# Altium PCB IOT_v2.PcbDoc
Units mil, origin at the board's own origin, x right, y up, seen from the top; angles counter-clockwise.
Board outline 2560 x 3850 mil, 2 copper layers (Top Layer, Bottom Layer); 69 components, 50 nets, 249 pads, 178 vias.
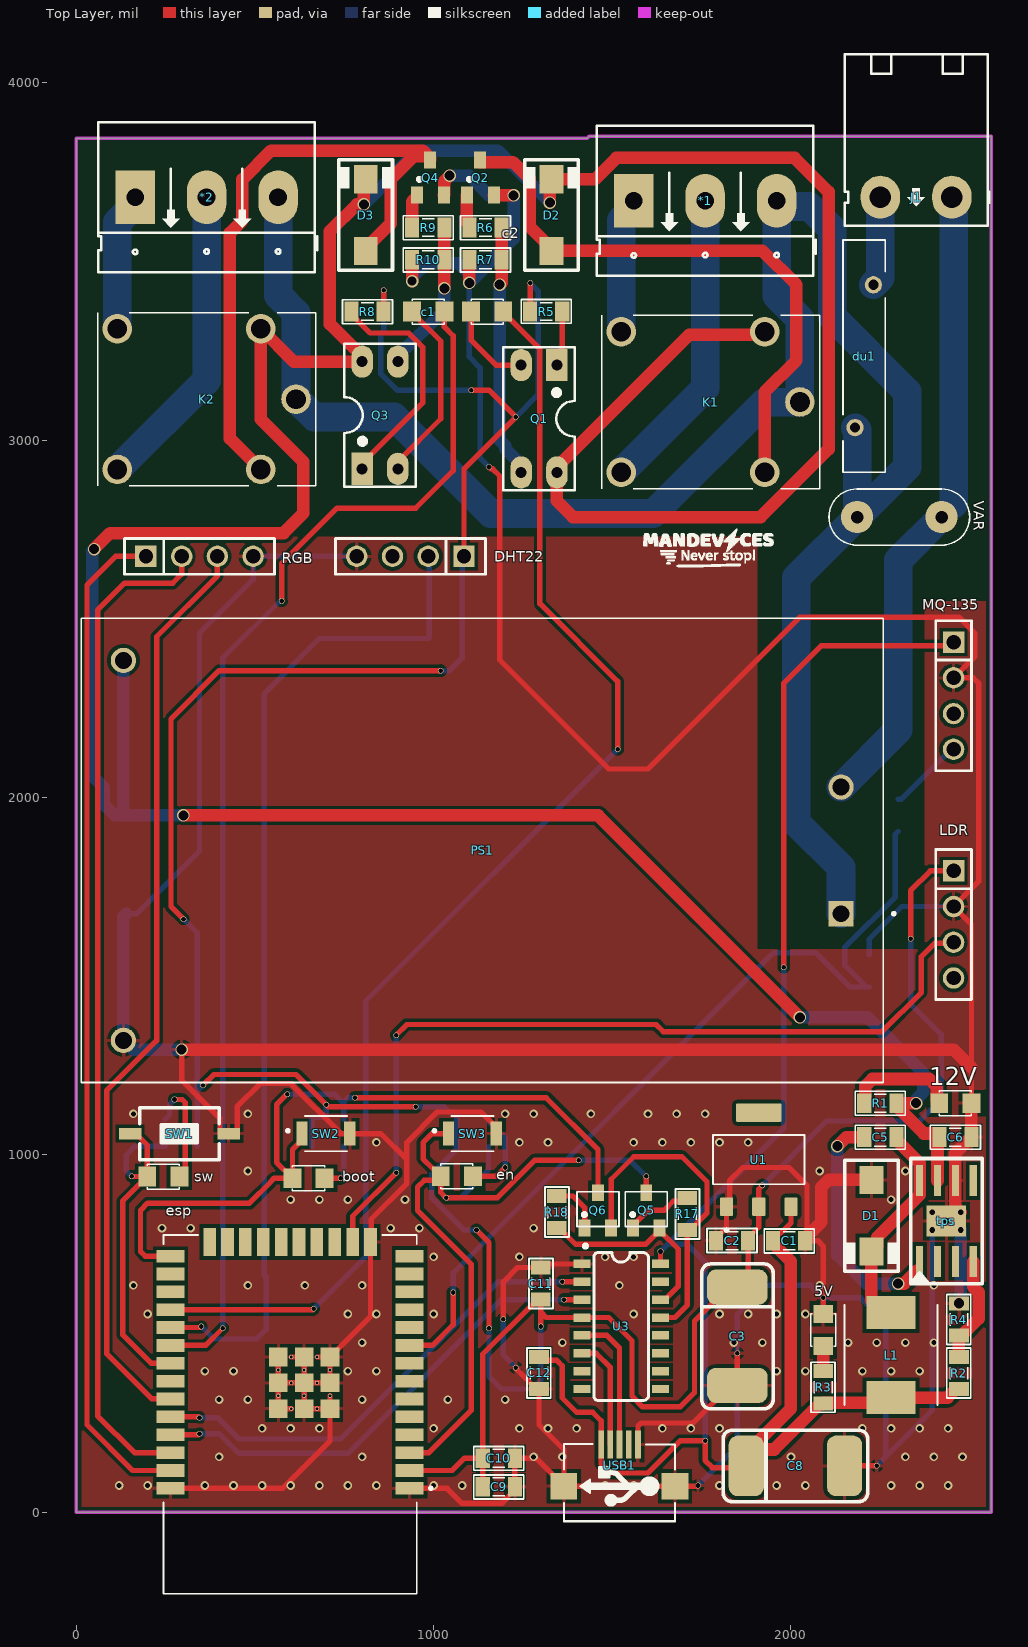
[diagram p0: Top Layer view]
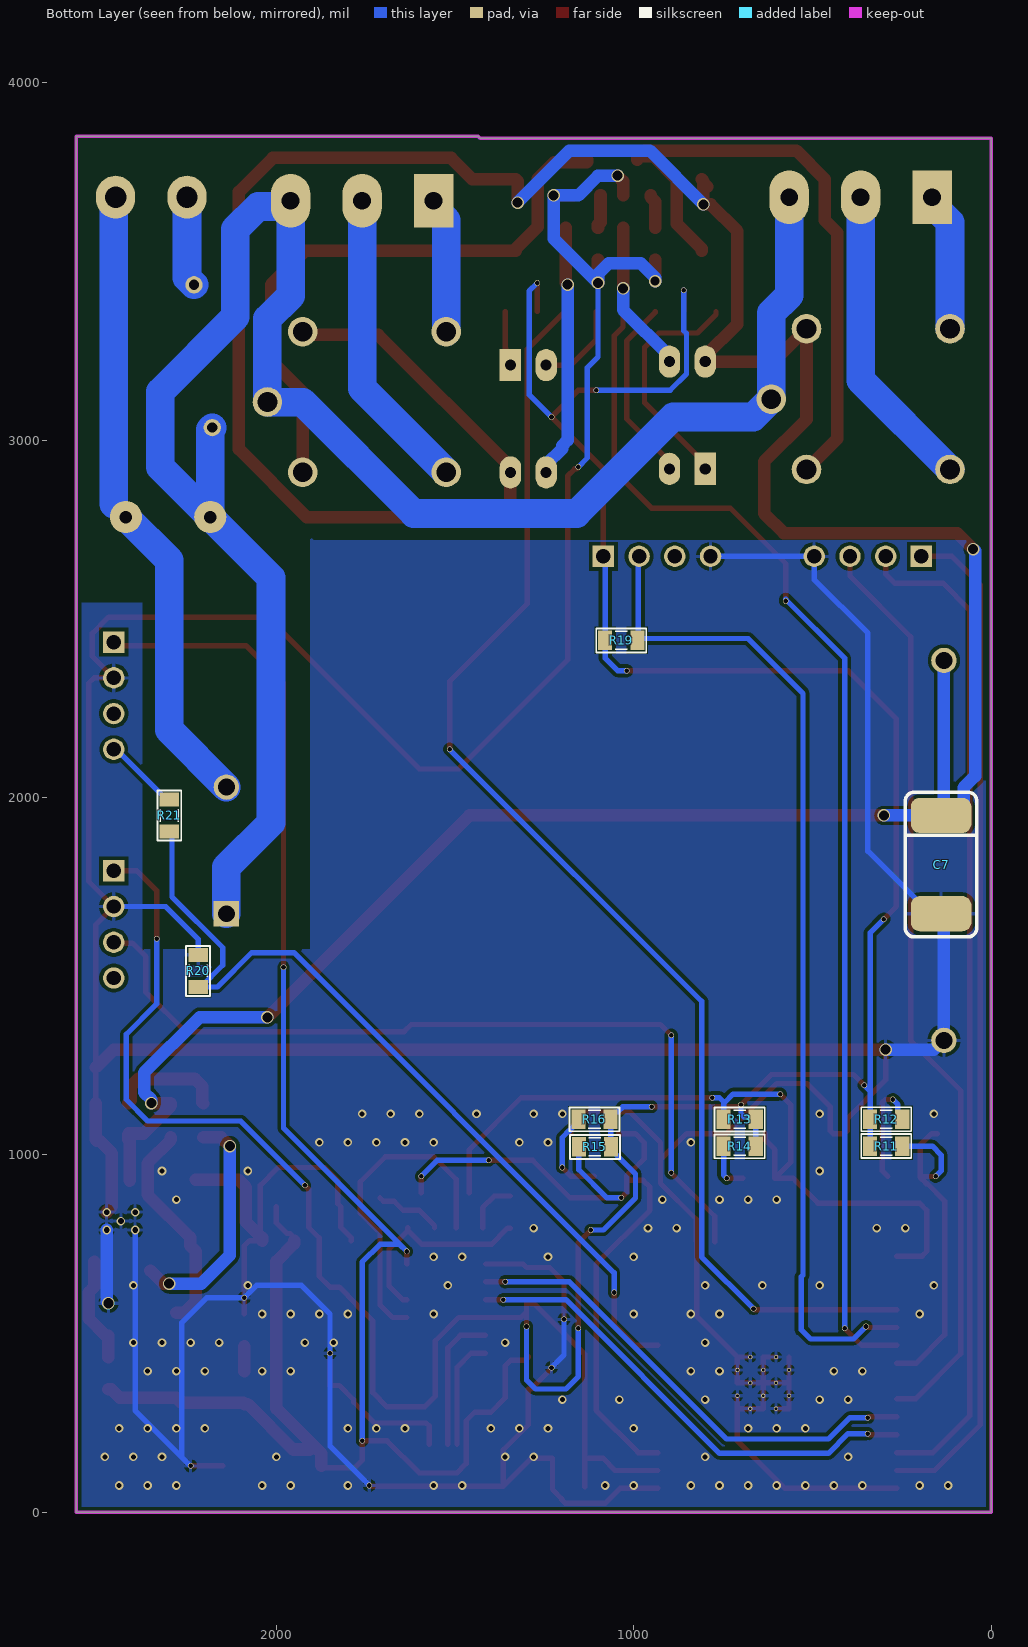
[diagram p1: Bottom Layer view, seen from below]

## Layer stack, top to bottom
Top Solder: solder mask 0.4, Solder Resist, Dk 3.5
Top Layer: signal copper 1.4
Dielectric 1: dielectric 12.6, FR-4, Dk 4.8
Bottom Layer: signal copper 1.4
Bottom Solder: solder mask 0.4, Solder Resist, Dk 3.5

## Board outline
0,0 0,3845 1430,3845 1435,3850 2560,3850 2560,0

## Design rules (kind name [scope] priority, off if disabled: settings)
Clearance [All] p1: gap=10 ignorepadtopadclearanceinfootprint=FALSE
DiffPairsRouting [All] p1: maxlimit=10 minlimit=10 mostfreqgap=10 toplayer_minwidth=15 toplayer_maxwidth=15 toplayer_prefwidth=15 bottomlayer_minwidth=15 bottomlayer_maxwidth=15 bottomlayer_prefwidth=15 maxuncoupledlength=500
PolygonConnect [All] p1: connectstyle=Relief reliefconductorwidth=10 reliefentries=4 polygonreliefangle="90 Angle" airgapwidth=10
RoutingVias [All] p1: holewidth=12.99 width=15.75 viastyle="Through Hole" minholewidth=12.99 minwidth=15.75 maxholewidth=12.99 maxwidth=15.75
SolderMaskExpansion [All] p1: expansion=4 istentingtop=FALSE
Width [All] p1: maxlimit=80 minlimit=15 preferedwidth=35
29 further rules are at their usual default settings.

## Classes and differential pairs
differential pair class diff: D0
component class Sensor: DHT22 LDR MQ-135 R19 R20 R21 RGB
component class Power: 5v 12V C1 C2 C3 C5 C6 C7 C8 D1 du1 J1 L1 L? PS1 PS? R1 R2 R3 R4 tps U1 VAR
component class MCU: C9 C10 C11 C12 esp Q5 Q6 R11 R12 R13 R14 R15 R16 R17 R18 SW1 SW2 SW3 U3 USB1
component class Driver: *1 *2 c2 D2 D3 K1 K2 Q1 Q2 Q3 Q4 R5 R6 R7 R8 R9 R10
differential pair D0: +D0_P -D0_N

## Components (designator, comment, footprint, x,y, rotation, side; value= is the part's Value field where it differs from the comment)
5V "LED" LED-0805-Blue 2090,465 r90 top value="LED 3 ly Single Colour" (schematic designator LED2)
12V "LED" LED-0805-Blue 2415,1145 r0 top value="LED 3 ly Single Colour" (schematic designator LED1)
*1 "BIG_Header 3" KF-128_3P 1560,3670 r0 top
*2 "BIG_Header 3" KF-128_3P 165,3680 r0 top
boot "LED" LED-0805-Blue 695,935 r180 top value="LED 3 ly Single Colour" (schematic designator LED6)
c1 "LED" LED-0805-Green 940,3360 r0 top value="LED 3 ly Single Colour" (schematic designator LED4)
C1 "104" CAP_0805 1995,760 r0 top value=33p
c2 "LED" LED-0805-Green 1105,3360 r0 top value="LED 3 ly Single Colour" (schematic designator LED3)
C2 "104" CAP_0805 1835,760 r180 top value=33p
C3 "100uF" CAP_7343 1850,495 r270 top
C5 "104" CAP_0805 2250,1050 r0 top value=33p
C6 "104" CAP_0805 2460,1050 r0 top value=33p
C7 "220uF-16V" CAP_7343 140,1815 r270 bottom
C8 "220uF-6.3V" CAP_7343 2010,130 r0 top
C9 "10uF" CAP_0805 1182.5,71.5 r0 top value=33p
C10 "10uF" CAP_0805 1182.5,151.5 r0 top value=33p
C11 "10nF" CAP_0805 1300,640 r90 top value=33p
C12 "100nF" CAP_0805 1295,390 r270 top value=33p
D1 "B340A" SMA 2225,830 r270 top
D2 "1N4007" SMA 1330,3630 r90 top value="Diode c?m 1N5408"
D3 "1N4007" SMA 810,3630 r90 top value="Diode c?m 1N5408"
DHT22 "JP4" JP4-C1T 1085,2675 r180 top (schematic designator DHT1)
du1 "Fused" FUSRR1015W52L1650T300H2620 2205,3235 r270 top
en "LED" LED-0805-Blue 1110,940 r180 top value="LED 3 ly Single Colour" (schematic designator LED7)
esp "ESP32-WROOM-32" MODULE_ESP32-WROOM-32 598.39,274.06 r180 top (schematic designator IC1)
J1 "AC_In" KF2-5.08T 2450,3680 r180 top
K1 "SRA-12VDC-CL" SRA12VDCCL 1775,3106.85 r180 top
K2 "SRA-12VDC-CL" SRA12VDCCL 365,3115 r180 top
L1 "15uH" IND_ASPI-0630LR-150M-T15 2280,440 r270 top
LDR "LDR" JP4-C1T 2455,1795 r270 top (schematic designator LDR1)
MQ-135 "JP4" JP4-C1T 2455,2435 r270 top (schematic designator MQ-1)
PS1 "HLK-20M12" CONV_HLK-20M12 1136.06,1852.17 r180 top
Q1 "PC817-B" DIP4/W0.3 1345,3210 r180 top
Q2 "2n2222" SOT23 1130,3735 r0 top value=C1815
Q3 "PC817-B" DIP4/W0.3 800,2920 r0 top
Q4 "2n222" SOT23 990,3735 r0 top value=C1815
Q5 "C1815" SOT23D 1595,845 r0 top
Q6 "C1815" SOT23D 1460,845 r0 top
R1 "2.2K" RES-SMD-0805 2250,1145 r0 top
R2 "10k" RES-SMD-0805 2470,389.5 r270 top
R3 "330" RES-SMD-0805 2090,350 r270 top
R4 "3.24K" RES-SMD-0805 2470,539.5 r270 top
R5 "130" RES-SMD-0805 1315,3360 r180 top
R6 "1K" RES-SMD-0805 1145,3595 r0 top
R7 "10K" RES-SMD-0805 1145,3505 r0 top
R8 "130" RES-SMD-0805 815,3360 r0 top
R9 "1K" RES-SMD-0805 985,3595 r0 top
R10 "10K" RES-SMD-0805 985,3505 r0 top
R11 "10k" RES-SMD-0805 293.62,1024.5 r0 bottom
R12 "330" RES-SMD-0805 293.62,1099.5 r0 bottom
R13 "10k" RES-SMD-0805 703.62,1099.5 r180 bottom
R14 "330" RES-SMD-0805 703.62,1024.5 r180 bottom
R15 "10k" RES-SMD-0805 1108.62,1023 r180 bottom
R16 "330" RES-SMD-0805 1110,1100 r180 bottom
R17 "10k" RES-SMD-0805 1710,835 r90 top
R18 "10k" RES-SMD-0805 1345,840 r90 top
R19 "10k" RES-SMD-0805 1035,2440 r180 bottom
R20 "20K" RES-SMD-0805 2219,1515 r270 bottom
R21 "10k" RES-SMD-0805 2300,1950 r90 bottom
RGB "JP4" JP4-C1T 195,2675 r0 top (schematic designator Module_RGB1)
sw "LED" LED-0805-Blue 288.62,939.5 r180 top value="LED 3 ly Single Colour" (schematic designator LED5)
SW1 "SW" BUTTON_2_SMD 288.62,1059.5 r0 top value="SW chip 2 pin"
SW2 "SW" SW_B3U-1000P 698.62,1059.5 r0 top value="SW chip 2 pin"
SW3 "SW" SW_B3U-1000P 1108.62,1059.5 r0 top value="SW chip 2 pin"
tps "TPS5430" TPS5430-2 2435,815 r90 top (schematic designator U2)
U1 "AMS1117-3.3" SOT229P700X180-4N 1909.84,986.69 r90 top
U3 "CH340C" SOP-16 1525,520 r270 top
USB1 "USB" USB-M1 1520,190 r180 top
VAR "Varistor" CAP_MICA_6MM 2185,2785 r0 top value=33p (schematic designator C4)

## Footprints (in the part's own frame and the unit in brackets; to place one, negate y for a bottom-side part, rotate by r counter-clockwise, add the part's x,y. Pads: shape width x height; smd on the part's side, far side on the other; paste and mask are expansions set on the pad)
BUTTON_2_SMD [mm]
  rect 1.6x0.8 smd: 1(-3.5,0) 2(3.5,0)
  silkscreen extent -2.82,-1.85 2.82,1.85, body extent -3.05,-1.85 3.05,1.85, height 2.5
CAP_0805 [mil]
  rect 39.37x55 smd: 1(-45,0) 2(45,0)
  silkscreen extent -70,-34 70,33, body extent -40,-25 40,25, height 24
CAP_7343 [mm] "Capacitor Tantalum 7343"
  rrect50% 2.5x4.3 smd: 1(-3.429,0) 2(3.556,0)
  silkscreen extent -5.08,-2.54 5.21,2.54, body extent -3.75,-2.14 3.75,2.16, height 2.8
CAP_MICA_6MM [mil]
  round 90 hole 35: 1(0,0) 2(236.22,0)
  silkscreen extent -79,-79 315,79, body extent -38,-79 277,79, height 539
CONV_HLK-20M12 [mm]
  rect 1.8x1.8 hole 1.2: 1(-25.5,4.5)
  round 1.8 hole 1.2: 2(-25.5,-4.5) 3(25.5,13.5) 4(25.5,-13.5)
  silkscreen extent -29.35,-16.5 28.5,16.5, body extent -28.5,-16.5 28.5,16.5, height 22.5
DIP4/W0.3 [mil] "4 PIN, W 300mil, Pin to pin 100mil"
  rect 60x90 hole 31: 1(0,0)
  oval 60x90 hole 31: 2(100,0) 3(100,300) 4(0,300)
  silkscreen extent -50,-50 150,350, body extent -59,-10 159,305, height 170
FUSRR1015W52L1650T300H2620 [mm]
  round 1.228 hole 0.72: 1(-5.075,0.65) 2(5.075,-0.65)
  silkscreen extent -8.25,-1.5 8.25,1.5
IND_ASPI-0630LR-150M-T15 [mm]
  rect 2.35x3.5 smd: 1(-3.025,0) 2(3.025,0)
  silkscreen extent -3.55,-3.3 3.55,3.3, body extent -3.6,-3.32 3.6,3.32, height 1.35
JP4-C1T [mm] "4 row, straight, gold plating"
  rect 1.52x1.52 hole 1.02: 1(0,0)
  round 1.52 hole 1.02: 2(2.54,0) 3(5.08,0) 4(7.62,0)
  silkscreen extent -1.52,-1.27 9.14,1.27, body extent -1.52,-1.25 9.14,1.25, height 8.51
KF2-5.08T [mil] "Header 2, 2 pin, hight 300mil, Pin to Pin 200, Colour Green"
  oval 110x120 hole 60: 1(0,0) 2(200,0)
  silkscreen extent -105,-400 300,80, body extent -97,-399 297,73, height 334
KF-128_3P [mil]
  rect 110x149.61 hole 50: 1(0,0)
  oval 110x149.61 hole 50: 2(200,0) 3(400,0)
  silkscreen extent -103,-210 510,210, body extent -101,-207 523,208, height 563
LED-0805-Blue [mil]
  rect 50x55 smd: 1(0,0) 2(90,0)
  silkscreen extent 0,-35 90,35, body extent 5,-25 85,25, height 43
LED-0805-Green [mil]
  rect 50x55 smd: 1(0,0) 2(90,0)
  silkscreen extent 0,-35 90,35, body extent 5,-25 85,25, height 43
MODULE_ESP32-WROOM-32 [mm]
  rect 2x0.9 smd: 1(-8.5,5.26) 2(-8.5,3.99) 3(-8.5,2.72) 4(-8.5,1.45) 5(-8.5,0.18) 6(-8.5,-1.09) 7(-8.5,-2.36) 8(-8.5,-3.63) 9(-8.5,-4.9) 10(-8.5,-6.17) 11(-8.5,-7.44) 12(-8.5,-8.71) 13(-8.5,-9.98) 14(-8.5,-11.25) 25(8.5,-11.25) 26(8.5,-9.98) 27(8.5,-8.71) 28(8.5,-7.44) 29(8.5,-6.17) 30(8.5,-4.9) 31(8.5,-3.63) 32(8.5,-2.36) 33(8.5,-1.09) 34(8.5,0.18) 35(8.5,1.45) 36(8.5,2.72) 37(8.5,3.99) 38(8.5,5.26)
  rect 0.9x2 smd: 15(-5.715,-12.25) 16(-4.445,-12.25) 17(-3.175,-12.25) 18(-1.905,-12.25) 19(-0.635,-12.25) 20(0.635,-12.25) 21(1.905,-12.25) 22(3.175,-12.25) 23(4.445,-12.25) 24(5.715,-12.25)
  rect 1.33x1.33 smd: 39_1(-2.835,-0.405) 39_2(-1,-0.405) 39_3(0.835,-0.405) 39_4(-2.835,-2.24) 39_5(-1,-2.24) 39_6(0.835,-2.24) 39_7(-2.835,-4.075) 39_8(-1,-4.075) 39_9(0.835,-4.075)
  round 0.3 hole 0.2: 39_10(-1.917,-0.405) 39_11(-0.082,-0.405) 39_12(-2.835,-1.322) 39_13(-1,-1.322) 39_14(0.835,-1.322) 39_15(-1.917,-2.24) 39_16(-0.082,-2.24) 39_17(-2.835,-3.157) 39_18(-1,-3.157) 39_19(0.835,-3.157) 39_20(-1.917,-4.075) 39_21(-0.082,-4.075)
  silkscreen extent -10.1,-12.75 9,12.75, body extent -9.02,-12.75 8.98,12.75, height 3.2
RES-SMD-0805 [mil]
  rect 39.37x55 smd: 1(-45,0) 2(45,0)
  silkscreen extent -70,-34 70,33, body extent -39,-25 39,25, height 31
SMA [mm]
  rect 2x1.7 smd: 1(-2.544,0) 2(2.544,0)
  silkscreen extent -3.94,-1.9 3.94,1.91, body extent -2.87,-1.4 2.87,1.4, height 2.29
SOP-16 [mm]
  rect 0.6x1.2 smd: 1(-4.445,-2.8) 2(-3.175,-2.8) 3(-1.905,-2.8) 4(-0.635,-2.8) 5(0.635,-2.8) 6(1.905,-2.8) 7(3.175,-2.8) 8(4.445,-2.8) 9(4.445,2.8) 10(3.175,2.8) 11(1.905,2.8) 12(0.635,2.8) 13(-0.635,2.8) 14(-1.905,2.8) 15(-3.175,2.8) 16(-4.445,2.8)
  silkscreen extent -5.84,-2.67 5.26,1.95, body extent -4.95,-3.47 4.95,3.47, height 1.75
SOT23 [mm] "SOT 23 _ 1-3-2"
  rect 0.85x1.2 smd: 1(-0.94,-1.245) 2(0.985,-1.25) 3(0.005,1.25)
  silkscreen extent -0.88,-0.25 -0.64,0, body extent -1.47,-1.33 1.53,1.17, height 1.06
SOT23D [mm] "SOT 23C - 1-3-2 - BCE"
  rect 0.85x1.2 smd: 1(-0.95,-1.25) 2(0.94,-1.245) 3(0,1.25)
  silkscreen extent -1.5,-1.14 1.5,1.32, body extent -1.5,-1.17 1.5,1.33, height 1.06
SOT229P700X180-4N [mm]
  rrect15% 1.31x0.93 smd: 1(-3.345,2.29) 2(-3.345,0) 3(-3.345,-2.29)
  rrect15% 1.31x3.24 smd: 4(3.345,0)
  silkscreen extent -5.1,-3.25 1.75,3.25, body extent -3.5,-3.25 3.5,3.25, height 1.8
SRA12VDCCL [mm]
  round 2.1 hole 1.4: 1(-3.85,-5) 2(6.35,-5) 3(6.35,5) 4(-3.85,5) 5(-6.35,0)
  silkscreen extent -7.75,-6.15 7.75,6.15, body extent -7.75,-6.15 7.75,6.15, height 14.1
SW_B3U-1000P [mm]
  rect 0.8x1.7 smd: 1(-1.7,0) 2(1.7,0)
  silkscreen extent -2.8,-1.25 1.5,1.25
TPS5430-2 [mm]
  rect 2.2x0.508 smd: 1(-2.875,1.905) 2(-2.875,0.635) 3(-2.875,-0.635) 4(-2.875,-1.905) 5(2.875,-1.905) 6(2.875,-0.635) 7(2.875,0.635) 8(2.875,1.905)
  rect 2.2x2.8 smd: 9(0,0)
  silkscreen extent -4.44,-2.54 4.44,2.54, body extent -3.33,-2.49 3.33,2.49, height 1.69
USB-M1 [mm]
  rect 0.4x2 smd: 1(1.3,0) 2(0.65,0) 3(0,0) 4(-0.65,0) 5(-1.321,0)
  rect 1.9x1.9 smd: 5(-3.95,2.968) 5(3.95,2.968)
  silkscreen extent -3.94,-0.03 3.94,5.46, body extent -3.98,0.11 4,5.54, height 2.71

## Part data
5V 12V boot c1 c2 en sw: "LED Single colour Green and Red"
C1 C2 C9 C10 C11 C12: library part CapSMD, "Capacitor", LatestRevisionDate=17-Jul-2002, LatestRevisionNote="Re-released for DXP Platform.", PackageReference=RAD-0.3, Published=8-Jun-2000, Publisher="Altium Limited"
C3: library part CAP_TAN_SMD, "https://linhkien.cxt.vn/8805-tu-tantalum-100uf-63v-7343-73x43mm.html"
C5 C6: library part CapSMD, "https://linhkien.cxt.vn/9232-tu-104-01uf-100nf-0805-25v-10-10c.html", LatestRevisionDate=17-Jul-2002, LatestRevisionNote="Re-released for DXP Platform.", PackageReference=RAD-0.3, Published=8-Jun-2000, Publisher="Altium Limited"
C7 C8: library part CAP_TAN_SMD, "https://linhkien.cxt.vn/2032-tu-tantalum-7343-cac-gia-tri.html"
D1: library part "Diode Schottky", "https://linhkien.cxt.vn/4563-b340a-13-f-diode-schottky-3a-40v-smado-214ac.html"
D2 D3: library part 1N5822, "https://linhkien.cxt.vn/1119-1n4007-m7-diode-chinh-luu-1a-1000v-smado-214ac-10c.html"
DHT22 MQ-135: "https://linhkien.cxt.vn/1788-header-duc-3p-xh254-3p-chan-thang-10c.html", Manufacturer="W¨¹rth Elektronik eiSos GmbH", partNo=613004143121, ComponentLink1 Description=Manufacturer, ComponentLink1URL=http://www.we-online.com, ComponentLink2 Description=Datasheet, ComponentLink2URL=http://katalog.we-online.de/em/datasheet/6130xx143121.pdf, Created by="Karrer Zheng", Created Date="29 March 2013", NoPins=04
du1: library part FuseNote2
esp: "Bluetooth, WiFi Transceiver Module 2.4GHz ~ 2.5GHz Surface Mount", Package="Module Espressif Systems", Digi-Key_Part_Number=1904-1010-1-ND, Digi-Key_Purchase_URL=https://www.digikey.com/product-detail/en/espressif-systems/ESP32-WROOM-32/1904-1010-1-ND/8544305?utm_source=snapeda&utm_medium=aggregator&utm_campaign=symbol, MF="Espressif Systems", MP=ESP32-WROOM-32, SnapEDA_Link=https://www.snapeda.com/parts/ESP32-WROOM-32/Espressif%20Systems/view-part/2753322/?ref=snap
J1: library part KF2, Manufacturer="Würth Elektronik eiSos GmbH", partNo=691103110002, ComponentLink1 Description=Manufacturer, ComponentLink1URL=http://www.we-online.com, ComponentLink2 Description=Datasheet, ComponentLink2URL=http://katalog.we-online.de/em/datasheet/6911031100xx.pdf, Created by="Karrer Zheng", Created Date="29 October 2013", NoPins=2
K1 K2: "https://linhkien.cxt.vn/3210-sra-12vdc-cl-songle-relay-20a-12vdc-5-chan.html", Manufacturer_Name="Songle Relay", Height=14mm, Manufacturer_Part_Number=SRA-12VDC-CL
L1: library part ASPI-0630LR-150M-T15, "https://linhkien.cxt.vn/3445-cuon-cam-150-15uh-0630-3a-7x7x3mm.html", Package="Nonstandard Abracon LLC", Check_prices=https://www.snapeda.com/parts/ASPI-0630LR-150M-T15/Abracon+LLC/view-part/?ref=eda, Digi-Key_Part_Number=ASPI-0630LR-150M-T15TR-ND, MF="Abracon LLC", MP=ASPI-0630LR-150M-T15, Purchase-URL=https://pricing.snapeda.com/search/part/ASPI-0630LR-150M-T15/?ref=eda, SnapEDA_Link=https://www.snapeda.com/parts/ASPI-0630LR-150M-T15/Abracon+LLC/view-part/?ref=snap
LDR: library part JP4, "https://linhkien.cxt.vn/1788-header-duc-3p-xh254-3p-chan-thang-10c.html", Manufacturer="W¨¹rth Elektronik eiSos GmbH", partNo=613004143121, ComponentLink1 Description=Manufacturer, ComponentLink1URL=http://www.we-online.com, ComponentLink2 Description=Datasheet, ComponentLink2URL=http://katalog.we-online.de/em/datasheet/6130xx143121.pdf, Created by="Karrer Zheng", Created Date="29 March 2013", NoPins=04
PS1: "20W ultra-small series module power supply", Package="Non-Standard Hi-link", Availability="Not in stock", Check_prices=https://www.snapeda.com/parts/HLK-20M12/Hi-link/view-part/?ref=eda, MF=Hi-link, MP=HLK-20M12, Price=None, SnapEDA_Link=https://www.snapeda.com/parts/HLK-20M12/Hi-link/view-part/?ref=snap
Q1 Q3: "https://linhkien.cxt.vn/10328-pc817-dip4.html", Package="DIP-4 American Bright", Availability=Unavailable, MF="American Bright", MP=PC817-B, Price=None, SnapEDA_Link=https://www.snapeda.com/parts/PC817-B/American%20Bright/view-part/524587/?ref=snap
Q2 Q4: library part C1815, "https://linhkien.cxt.vn/2040-2n2222-1p-npn-transistor-600ma-40v-sot-23-10c.html"
Q5 Q6: library part 2SC1815, "NPN 600mW, ECB"
R1: library part "Resistor - SMD", "https://linhkien.cxt.vn/5089-dien-tro-0805-1-thong-so-tu-1k-den-91k.html", Manufacturer="Generic Components", Class=Passive, Published=08/06/2000, Publisher="Altium Hobart Technology Centre"
R2: library part "Resistor - SMD", "https://linhkien.cxt.vn/6741-dien-tro-0805-1-thong-so-tu-1k-den-91k.html", Manufacturer="Generic Components", Class=Passive, Published=08/06/2000, Publisher="Altium Hobart Technology Centre"
R3: library part "Resistor - SMD", "https://linhkien.cxt.vn/2346-dien-tro-0805-1-thong-so-tu-1k-den-91k.html", Manufacturer="Generic Components", Class=Passive, Published=08/06/2000, Publisher="Altium Hobart Technology Centre"
R4: library part "Resistor - SMD", "https://linhkien.cxt.vn/6162-dien-tro-59k-0805-1-50c.html", Manufacturer="Generic Components", Class=Passive, Published=08/06/2000, Publisher="Altium Hobart Technology Centre"
R5 R8: library part "Resistor - SMD", "https://linhkien.cxt.vn/2109-dien-tro-130r-0805-5-50c.html", Manufacturer="Generic Components", Class=Passive, Published=08/06/2000, Publisher="Altium Hobart Technology Centre"
R6 R9: library part "Resistor - SMD", "https://linhkien.cxt.vn/6152-dien-tro-174k-0805-1-50c.html", Manufacturer="Generic Components", Class=Passive, Published=08/06/2000, Publisher="Altium Hobart Technology Centre"
R7 R12 R14 R16: library part "Resistor - SMD", "Resistor SMD", Manufacturer="Generic Components", Class=Passive, Published=08/06/2000, Publisher="Altium Hobart Technology Centre"
R10: library part "Resistor - SMD", "17.4K", Manufacturer="Generic Components", Class=Passive, Published=08/06/2000, Publisher="Altium Hobart Technology Centre"
R11 R13 R15 R17 R18: library part "Resistor - SMD", "Resistor", Manufacturer="Generic Components", Class=Passive, Published=08/06/2000, Publisher="Altium Hobart Technology Centre"
R19: library part "Resistor - SMD", "1k", Manufacturer="Generic Components", Class=Passive, Published=08/06/2000, Publisher="Altium Hobart Technology Centre"
R20 R21: library part "Resistor - SMD", Manufacturer="Generic Components", Class=Passive, Published=08/06/2000, Publisher="Altium Hobart Technology Centre"
RGB: "https://linhkien.cxt.vn/1789-header-duc-254-chan-thang.html / https://shopee.vn/Module-Led-RGB-5050-i.90668226.3044531135", Manufacturer="W¨¹rth Elektronik eiSos GmbH", partNo=613004143121, ComponentLink1 Description=Manufacturer, ComponentLink1URL=http://www.we-online.com, ComponentLink2 Description=Datasheet, ComponentLink2URL=http://katalog.we-online.de/em/datasheet/6130xx143121.pdf, Created by="Karrer Zheng", Created Date="29 March 2013", NoPins=04
SW1 SW2 SW3: library part SW2, "https://linhkien.cxt.vn/1779-nut-nhan-smd-2p.html"
tps: "https://linhkien.cxt.vn/7312-tps54302ddct-ic-reg-buck-adj-3a-tsot23-6.html", Name=TPS5430
U1: "Sot223/Pkg 1-Amp 3.3-Volt Low Drop Out Voltage Regulatator", Package="SOT-223 Seeed Technology", Availability="Not in stock", Check_prices=https://www.snapeda.com/parts/AMS1117-3.3/Advanced+Monolithic+Systems/view-part/?ref=eda, MF="Advanced Monolithic Systems", MP=AMS1117-3.3, Price=None, SnapEDA_Link=https://www.snapeda.com/parts/AMS1117-3.3/Advanced+Monolithic+Systems/view-part/?ref=snap
U3: "https://linhkien.cxt.vn/4690-ch340c-ic-transceiver-2mbps-usb20-sop-16.html", Package=Package, Availability=Unavailable, Check_prices=https://www.snapeda.com/parts/CH340C/WCH/view-part/5428851/?ref=eda, MF=WCH, MP=CH340C, Price=None, SnapEDA_Link=https://www.snapeda.com/parts/CH340C/WCH/view-part/5428851/?ref=snap
USB1: library part USB-M
VAR: library part CapCeramic, "10D561K", LatestRevisionDate=17-Jul-2002, LatestRevisionNote="Re-released for DXP Platform.", PackageReference=RAD-0.3, Published=8-Jun-2000, Publisher="Altium Limited"

## Via types
v1: diameter 24, hole 14, Top Layer to Bottom Layer, tented both sides, 112 vias
v2: diameter 15.75, hole 12.99, Top Layer to Bottom Layer, tented both sides, 45 vias
v3: diameter 35, hole 28, Top Layer to Bottom Layer, tented both sides, 15 vias
v4: diameter 24, hole 16, Top Layer to Bottom Layer, tented both sides, 5 vias
v5: diameter 35, hole 25, Top Layer to Bottom Layer, tented both sides, 1 vias

## Nets (pads, with @x,y where several pads share a name; then routed paths per layer and width w, separated by ;. In a path a pad name is that pad's centre, name@x,y a point inside that pad or via, vN(x,y) a via of type N, cw(c..) or ccw(c..) an arc to the next point about the centre after c; other vN are vias at no path point)
3V3: C2.1 C3.1 C9.1 C10.1 C11.1 DHT22.1 esp.2 LDR.1 R5.2 R8.2 R11.2 R12.2 R13.2 R14.2 R15.2 R16.2 R19.1 U1.2 U3.4 | length 9822.6
  Top Layer w15: v2(300,1660) 265,1695 265,2220 400,2355 v2(1020,2355) ; v2(354.63,1195) 354.77,1195.14 355.14,1195.14 385,1225 615,1225 v2(700,1140) 700.2,1140 705.58,1134.63 v2(950,1134.63) ; R8.2 v2(860,3420) ; esp.2 1051.97,116.97 1086.5,151.5 C10.1 ; DHT22.1 1085,2920 v2(1230,3065) 1155,3140 v2(1105,3140) ; v2(1120,790) 1155,755 v2(1155,515) ; C9.1 C10.1 ; R5.2 v2(1270,3440) ; v2(1300,520) 1300,560 ; v2(1920,915) 1920,914.8 1909.84,904.64 U1.2 1909.84,797.66 1880,767.81 C2.1 1880,660 C3.1 1823.82,630 1776.87,583.04 1776.87,581.87 1730,535 1730,335 1690,295 1585,295 1555,325 1555,480 1490,545 U3.4 1315,545 1300,560 ; v2(2335,1605) 2335,1740 2390,1795 LDR.1 ; C10.1 1137.5,442.5 1277.81,582.81 1287.81,582.81 C11.1 1300,560
  Bottom Layer w15: v2(300,1660) 338.62,1621.38 R12.2 ; R11.2 R12.2 ; v2(354.63,1195) 354.63,1194.8 338.62,1178.79 R12.2 ; R14.2 R13.2 664.13,1105 690,1105 699.86,1114.86 699.86,1139.86 v2(700,1140) ; v2(860,3420) 860,3306.31 852.5,3298.81 852.5,3185.32 897.82,3140 v2(1105,3140) ; v2(950,1134.63) 1030.38,1134.63 1045,1120 1052.82,1120 1065,1107.81 R16.2 1064.31,1099.31 1064.31,1023.69 R15.2 1063.63,1015.18 995,946.56 995,880 1085,790 v2(1120,790) ; v2(1020,2355) 1045,2355 1080,2390 R19.1 1080,2670 DHT22.1 ; v2(1155,515) 1155,380 1190,345 1275,345 1300,370 v2(1300,520) ; v2(1230,3065) 1292.5,3127.5 1292.5,3417.5 v2(1270,3440) ; v2(1920,915) 2100,1095 2360,1095 2420,1155 2420,1337.5 2335,1422.5 v2(2335,1605)
5V: C1.1 C8.1 C12.1 L1.2 MQ-135.1 R2.2 R3.2 U1.3 U3.16 USB1.1 | length 5341.4
  Top Layer w15: C12.1 1305,425 1345,425 1360,410 1360,320 1400,280 1445,280 1468.82,256.18 USB1.1 1468.82,136.18 1495,110 1600,110 1690,200 v2(1760,200) 1760,145 1780,125 1870,125 C8.1 ; v2(1635,730) 1635,695.24 U3.16 ; C1.1 1950,767.81 1962.19,780 1970,780 2000,810 U1.3 ; v2(1980,1525) 1980,2320 2085,2425 2445,2425 MQ-135.1
  Top Layer w35: C8.1 1875,165.43 2000,290.43 2000,702.19 1950,752.19 C1.1 ; C8.1@1906.17,175.75 1952.94,175.75 2080,302.82 2087.81,302.82 2092.19,307.19 2266.28,307.19 L1.2 2438.59,320.91 2462.19,344.5 R2.2
  Bottom Layer w15: v2(1760,200) 1760,700 1710,750 1655.2,750 1635.2,730 v2(1635,730) 1980,1075 v2(1980,1525)
12V: C6.1 C7.1 D2.2 D3.2 K1.1 K2.1 PS1.4 Q1.4 Q3.4 R1.2 tps.7 | length 10300
  Top Layer w35: v3(50,2695) 95,2740 580,2740 635,2795 635,2940 516.57,3058.43 K2.1 608.43,3220 Q3.4 800,3235 710,3325 710,3585 785,3660 v3(805,3660) D3.2@805,3720.08 ; v3(300,1950) 1460,1950 v3(2025,1385) ; D3.2@794.04,3709.12 D3.2@805,3720.08 ; D3.2 805,3725.16 D3.2@805,3720.08 ; v3(1325,3665) 1325,3725.16 D2.2 1451.46,3730.16 1511.31,3790 2010,3790 2105,3695 2105,2975 1915,2785 1390,2785 1375.04,2799.96 1345,2830 Q1.4 1345,2925 1715,3295 1917.87,3295 K1.1 ; v3(2350,1145) R1.2 2295,1137.19 2372.18,1060 2412.81,1060 2415,1057.81 C6.1 2415,1042.19 2410,1037.19 tps.7
  Bottom Layer w35: v3(50,2695) 45,2690 45,2060 77.24,2027.76 77.24,1981.17 108.41,1950 C7.1 ; PS1.4 132.13,1957.87 C7.1 ; v3(300,1950) C7.1 ; v3(805,3660) 955,3810 1180,3810 v3(1325,3665) ; v3(2025,1385) 2215,1385 2370,1230 2370,1175 2350,1155 v3(2350,1145)
COM1: *1.3 *2.3 du1.2 K1.5 K2.5 PS1.1 VAR.1 | length 5469.4
  Bottom Layer w80: *2.3 565,3406.03 615,3356.03 K2.5 615.72,3115 665.72,3065 890,3065 1160,2795 1615,2795 1926.34,3106.34 2024.49,3106.34 K1.5 2025,3339.46 1960,3404.46 *1.3@1960,3667.71 ; *1.3 *1.3@1960,3667.71 ; PS1.1 2140,1805 2015,1930 2015,2615 VAR.1 ; du1.2 2185,3029.61 VAR.1 ; *1.3@1960,3667.71 1973.86,3653.85 2051.15,3653.85 2115,3590 2115,3345 2325,3135 2325,2925 VAR.1
D0_N: U3.5 USB1.3 | length 389.7
  Top Layer w15: U3.5 1485,495 1520,460 USB1.3
D0_P: U3.6 USB1.2 | length 311.6
  Top Layer w15: U3.6 1455,445 1494.41,405.59 USB1.2
DTR: Q6.2 R17.1 U3.13 | length 910.7
  Top Layer w15: Q6.2 1497,932 1560,995 1695,995 1765,925 1765,837.18 1717.81,790 R17.1 ; U3.13 1675,545 1710,580 R17.1@1710,780
EN: en.2 esp.3 Q5.3 R15.1 SW3.1 | length 2133
  Top Layer w15: esp.3 986.97,166.97 1105,285 1105,695 955,845 955,910 973.79,928.79 1008.79,928.79 en.2 ; SW3.1 995.33,1059.5 970.83,1035 970.83,989.17 1000,960 1002.5,960 1020,942.5 en.2 ; v2(1405.97,985) 1282.6,985 1177.6,880 v2(1035,880) 1020,895 en.2 ; Q5.3 v2(1595,940)
  Bottom Layer w15: v2(1035,880) 1075,880 1153.63,958.63 R15.1 ; v2(1405.97,985) 1550,985 v2(1595,940)
GND: 5V.2 12V.2 C1.2 C2.2 C3.2 C6.2 C7.2 C8.2 C9.2 C10.2 C11.2 C12.2 D1.1 DHT22.4 esp.1 esp.15 esp.38 esp.39_1 esp.39_2 esp.39_3 esp.39_4 esp.39_5 esp.39_6 esp.39_7 esp.39_8 esp.39_9 esp.39_10 esp.39_11 esp.39_12 esp.39_13 esp.39_14 esp.39_15 esp.39_16 esp.39_17 esp.39_18 esp.39_19 esp.39_20 esp.39_21 LDR.2 MQ-135.2 PS1.3 Q2.2 Q4.2 R4.1 R7.1 R10.1 R20.1 RGB.4 SW1.2 SW2.2 SW3.2 tps.6 tps.9 U1.1 U3.1 USB1.5 | length 19211.9
  Top Layer w15: esp.38 576.97,66.97 710,200 esp.39_1 ; v3(295,1295) 295,1210 402.42,1102.58 402.42,1067.75 410.67,1059.5 SW1.2 442.17,1059.5 450.42,1067.75 450.42,1135.42 515,1200 600,1200 740.5,1059.5 852.17,1059.5 925,986.67 ; esp.39_9 esp.39_19 esp.39_6 ; esp.39_11 esp.39_3 esp.39_14 esp.39_6 ; esp.39_21 esp.39_8 esp.39_18 esp.39_5 ; esp.39_20 esp.39_7 ; esp.39_12 esp.39_1 ; esp.1 1038.03,66.97 1080,25 1191.21,25 1201.82,35.61 1201.82,38.01 1227.5,63.69 C9.2 C10.2 1286.15,151.5 USB1.5@1364.49,73.16 ; v2(1155,2925) 1155.2,2925 1160.2,2920 1165,2920 1185,2900 1185,2385 1490,2080 1600,2080 2025,2505 2469.59,2505 2515,2459.59 2515,2395 MQ-135.2 2510,2335 2525,2320 2525,1765 LDR.2 2505,1645 2505,1245 12V.2 ; SW3.2 1175.55,1077.21 1132.77,1120 1010,1120 925,1035 925,986.67 ; v2(1195,540) 1195,645 1235,685 C11.2 1310,695 U3.1 ; v2(1230,405) 1230.14,404.86 1230.14,402.04 1287.19,345 C12.2 1295,245 1365,175 1365,73.67 USB1.5@1364.49,73.16 ; USB1.5@1572,190 1572,241.21 1580.79,250 1725.36,250 1783.41,308.06 1783.41,314.59 1823.82,355 C3.2 v2(1850,445) ; v2(1740,75) 1739.8,75 1737.96,73.16 1675.51,73.16 USB1.5@1364.49,73.16 ; C2.2 1790,767.81 1819.68,797.5 U1.1 1828.29,863.6 1828.29,928.29 1865,965 1995,965 2045,915 C1.2@2045,772.81 ; C1.2 2075,760 2090,745 v2(2090,600) 5V.2 ; C8.2 v2(2240,130) ; esp.39_6 esp.39_16 esp.39_5 ; esp.39_5 esp.39_13 esp.39_2 esp.39_10 esp.39_1 ; esp.39_5 esp.39_15 esp.39_4 esp.39_17 esp.39_7 ; esp.39_7 823.39,547.87 esp.15 825,757.95 825,820 925,920 925,986.67
  Top Layer w35: v3(295,1295) 2455,1295 2505,1245 ; v5(940,3445) R10.1 ; Q4.2 1029.57,3686.55 1029.57,3724.57 v3(1045,3740) ; v3(1100,3440) R7.1 ; Q2.2 1169.57,3685 v3(1224.04,3685) ; C1.2 2040,767.81 2085,812.81 2085,910 2105.16,930.16 D1.1 ; v4(2475,840) 2460,855 tps.6 2460,1005 2495,1040 2502.81,1040 2505,1042.19 C6.2 12V.2
  Bottom Layer w15: C7.2 170,1675 345,1850 345,2460 495,2610 RGB.4 DHT22.4 ; v3(1100,3440) 1100,3232.67 1130.37,3202.29 1130.37,3000.37 1130,3000 1130,2950 v2(1155,2925) ; v2(1195,540) 1195,440 v2(1230,405) ; v2(1740,75) 1850,185 v2(1850,445) 1850,555 1930,635 2055,635 v2(2090,600) 2195,600 2265,530 2265,155 ; R20.1 2219,1604 2310,1695 LDR.2 ; v2(2240,130) 2265,155 ; v4(2395,790) 2395,285 2265,155
  Bottom Layer w35: C7.2 132.13,1667.13 PS1.3 134.33,1320.67 160,1295 v3(295,1295) ; v5(940,3445) 940,3455 980,3495 1070,3495 1100,3465 v3(1100,3440) 1224.04,3564.04 v3(1224.04,3685) 1155,3685 1100,3740 v3(1045,3740) ; v3(2470,585) 2475,590 v4(2475,790)
  other v1: 120,75 200,75 360,75 440,75 520,75 600,75 680,75 760,75 840,75 1000,75 1080,75 1480,75 1560,75 1800,75 1960,75 2040,75 2280,75 2360,75 2440,75 400,155 800,155 1280,155 1360,155 2000,155 2320,155 2400,155 2480,155 520,235 600,235 680,235 1000,235 1240,235 1320,235 1400,235 1640,235 1720,235 1800,235 2200,235 2280,235 2360,235 2440,235 400,315 480,315 800,315 1040,315 1200,315 360,395 440,395 760,395 840,395 1960,395 2040,395 2200,395 2280,395 2360,395 800,475 1360,475 1840,475 1920,475 2160,475 2240,475 2320,475 2400,475 200,555 760,555 840,555 1000,555 1560,555 1800,555 1880,555 1960,555 2040,555 160,635 480,635 640,635 800,635 1520,635 2080,635 2400,635 1000,715 1240,715 1480,715 1560,715 240,795 320,795 880,795 960,795 1280,795 600,875 680,875 760,875 920,875 2280,875 480,955 2080,955 2320,955 840,1035 1240,1035 1320,1035 1560,1035 1640,1035 1720,1035 1800,1035 1880,1035 160,1115 480,1115 1200,1115 1280,1115 1440,1115 1600,1115 1680,1115 1760,1115
  other v4: 2435,815 2395,840
IO_0: boot.2 esp.25 Q6.3 R13.1 SW2.1 | length 2182.2
  Top Layer w15: esp.25 193.03,716.97 180,730 180,845 200,865 485,865 545,925 545,926.21 553.79,935 boot.2 ; v2(590,1170) 560.83,1140.83 560.83,979.17 boot.2 ; SW2.1 631.7,1041.78 605,1015.09 boot.2 ; v2(780,1160) 1315,1160 1460,1015 Q6.3
  Bottom Layer w15: v2(590,1170) 722.25,1170 746.13,1146.13 ; R13.1 748.63,1143.63 746.13,1146.13 ; v2(780,1160) 760,1160 746.13,1146.13
IO_4: esp.26
IO_5: DHT22.2 esp.29 R19.2 | length 2831.4
  Top Layer w15: esp.29 346.77,516.97 349.8,520 v2(350,520)
  Bottom Layer w15: v2(350,520) 385,485 505,485 530,510 531.21,510 531.21,658.79 526.21,663.79 526.21,2291.21 680,2445 985,2445 987.5,2447.5 987.5,2672.5 DHT22.2
IO_13: esp.16 LDR.3 | length 2371.9
  Top Layer w15: esp.16 773.39,828.39 v2(895,950) ; v2(895,1335) 925,1365 1622.5,1365 1642.5,1345 2255,1345 2365,1455 2365,1555 2402.58,1592.58 2452.58,1592.58 LDR.3
  Bottom Layer w15: v2(895,950) v2(895,1335)
IO_17: c2.2 esp.28 | length 3677.1
  Top Layer w15: esp.28 661.77,566.97 664.8,570 v2(665,570) ; c2.2 1195,3357.5 1297.5,3255 1297.5,2542.5 1515,2325 v2(1515,2135)
  Bottom Layer w15: v2(665,570) 810,715 810,1430 v2(1515,2135)
IO_18: c1.2 esp.30 | length 3422.6
  Top Layer w15: esp.30 361.97,466.97 v2(410,515) ; v2(574.68,2550.12) 574.68,2654.68 730,2810 950,2810 1055,2915 1055,3292 1030,3317 c1.2
  Bottom Layer w15: v2(410,515) 410,2390 v2@575,2555
IO_19: esp.31 R11.1 SW1.1 sw.2 | length 1017
  Top Layer w15: SW1.1 166.58,1059.5 198.62,1027.45 sw.2 ; v2(155,940) 155.2,940 155.7,939.5 sw.2 ; esp.31 210.3,416.97 130,497.27 130,870.87 178.62,919.5 181.12,919.5 198.62,937 sw.2
  Bottom Layer w15: v2(155,940) 155,940.2 140,955.2 140,1000 164.5,1024.5 R11.1
IO_21: esp.33 RGB.3 | length 2590.8
  Top Layer w15: esp.33 262.51,318.2 210.66,318.2 85,443.86 85,1180 225,1320 225,2450 395,2620 RGB.3
IO_22: esp.36 RGB.2 | length 2827.8
  Top Layer w15: esp.36 163.03,166.97 60,270 60,2525 135,2600 270,2600 295,2625 RGB.2
IO_23: esp.37 RGB.1 | length 2834.9
  Top Layer w15: RGB.1 110,2675 30,2595 30,245 158.03,116.97 esp.37
IO_33: esp.9 R20.2 R21.1 | length 2388.5
  Top Layer w15: esp.9 996.97,466.97 1055,525 v2(1055,615)
  Bottom Layer w15: v2(1055,615) 1055,670 1951.19,1566.19 2068.82,1566.19 2165,1470 R20.2@2211.19,1470 ; R20.2 R20.2@2211.19,1470 ; R21.1 2292.19,1897.18 2292.19,1722.19 2150,1580 2150,1531.19 R20.2@2211.19,1470
NC1: *1.2 K1.3 | length 857.3
  Bottom Layer w80: K1.3 1760,3145 *1.2
NC2: *2.2 K2.3 | length 865.4
  Bottom Layer w80: K2.3 365,3168.15 *2.2
NetC5_1: C5.1 tps.1 | length 660.9
  Top Layer w35: v3(2130,1025) 2154.28,1049.28 2204.28,1049.28 C5.1 ; v3(2300,640) 2316.5,640 tps.1@2352.5,676
  Bottom Layer w35: v3(2130,1025) 2130,720 2210,640 v3(2300,640)
NetC5_2: C5.2 D1.2 L1.1 tps.8 | length 609.8
  Top Layer w35: L1.1 2257.36,559.09 2225,591.46 D1.2 2240.96,745.81 2240.96,769.4 2360,888.43 2360,977.18 2295,1042.19 C5.2
Netdu1_1: du1.1 J1.2 | length 253.2
  Bottom Layer w80: du1.1 2250,3454.21 J1.2
NetLED1_1: 12V.1 R1.1 | length 315.3
  Top Layer w35: R1.1 2207.18,1147.19 2207.18,1192 2227.69,1212.5 2387,1212.5 2407.5,1192 2407.5,1152.5 12V.1
NetLED2_1: 5V.1 R3.1 | length 70
  Top Layer w35: R3.1 5V.1
NetLED3_1: c2.1 Q1.2 | length 249
  Top Layer w15: c2.1 1105,3280 1175,3210 Q1.2
NetLED4_1: c1.1 Q3.2 | length 522.8
  Top Layer w15: Q3.2 900,2940 1020,3060 1020,3277.5 940,3357.5 c1.1
NetLED5_1: R12.1 sw.1 | length 313.4
  Top Layer w15: v2@275.2,1155 296.21,1155 305,1146.21 305,955.87 sw.1
  Bottom Layer w15: R12.1 260.81,1111.68 260.81,1140.81 v2(275,1155)
NetLED6_1: boot.1 R14.1 | length 138.1
  Top Layer w15: boot.1 v2(740,935)
  Bottom Layer w15: v2(740,935) 740,935.2 748.63,943.83 R14.1
NetLED7_1: en.1 R16.1 | length 254.8
  Top Layer w15: en.1 1175,940 v2(1200,965)
  Bottom Layer w15: R16.1 1155,1092.19 1179.19,1068 1180.56,1068 1200,1048.56 v2(1200,965)
NetMQ-1_4: MQ-135.4 R21.2 | length 213
  Bottom Layer w15: R21.2 2307.82,1995 2447.82,2135 MQ-135.4
NetQ1_1: Q1.1 R5.1 | length 156.2
  Top Layer w15: Q1.1 1357.5,3222.5 1357.5,3255.5 1360,3258 R5.1
NetQ1_3: Q1.3 R6.2 R7.2 | length 711.9
  Top Layer w35: v3(1185,3435) 1190,3440 R7.2 R6.2
  Bottom Layer w35: v3(1185,3435) 1185,3000 1200,2985 1200,2976.76 1245,2931.76 Q1.3
NetQ2_1: Q2.1 R6.1 | length 93.9
  Top Layer w35: Q2.1 1093,3609.81 1100,3602.81 R6.1
NetQ3_1: Q3.1 R8.1 | length 656.4
  Top Layer w15: R8.1 770,3352.19 822.18,3300 930,3300 970,3260 970,3105 800,2935 Q3.1
NetQ3_3: Q3.3 R9.2 R10.2 | length 428.8
  Top Layer w35: v3(1030,3425) R10.2 R9.2
  Bottom Layer w35: Q3.3 900,3235 1030,3365 v3(1030,3425)
NetQ4_1: Q4.1 R9.1 | length 96.4
  Top Layer w35: R9.1 940,3667.64 953,3680.65 Q4.1
NetQ5_1: Q5.1 R17.2 | length 191.3
  Top Layer w15: Q5.1 1557.6,802.68 1599.92,845 1645,845 1670.5,870.5 1700.5,870.5 R17.2
NetQ6_1: Q6.1 R18.2 | length 147.7
  Top Layer w15: R18.2 1390,885 1422.6,852.4 Q6.1
NetR2_1: R2.1 R4.2 tps.4 | length 300.9
  Top Layer w35: R2.1 R4.2 2477.81,494.5 2525,541.68 2525,615.58 2510,630.58 tps.4
NEUTRAL: J1.1 PS1.2 VAR.2 | length 1732.7
  Bottom Layer w80: PS1.2 2300,2189.33 2300,2663.78 VAR.2 ; J1.1 2455,3675 2455,2821.49
NO1: *1.1 K1.2 | length 380.8
  Bottom Layer w80: K1.2 1525,3615.2 1560,3650.2 *1.1
NO2: *2.1 K2.2 | length 388.9
  Bottom Layer w80: K2.2 115,3610.2 165,3660.2 *2.1
relay1-: D2.1 K1.4 Q2.3 | length 1676.3
  Top Layer w35: Q2.3 1130.2,3778.86 1130.97,3778.09 1221.91,3778.09 1269.04,3730.96 1269.04,3596.71 1330,3535.75 D2.1 1920.16,3529.84 2015,3435 2015,3223.16 1926.57,3134.74 K1.4
relay2-: D3.1 K2.4 Q4.3 | length 1780.2
  Top Layer w35: K2.4 430,3004.72 430,3580 465,3615 465,3730 545,3810 945,3810 969.77,3810 990.2,3789.57 Q4.3 ; D3.1 810,3535.75 880,3605.75 880,3730 945,3795 969.77,3795
RST: Q5.2 R18.1 U3.14 | length 572.3
  Top Layer w15: R18.1 1352.81,795 1397.81,750 1592.89,750 Q5.2@1632,789.11 ; Q5.2 Q5.2@1632,789.11 ; U3.14 1647.05,595 1685,632.95 1685,736.11 Q5.2@1632,789.11
RX: esp.35 U3.3 | length 1353.2
  Top Layer w15: esp.35 341.77,216.97 344.8,220 v2(345,220) ; v2(1365,595) U3.3
  Bottom Layer w15: v2(345,220) 400,220 455,165 760,165 1190,595 v2(1365,595)
TX: esp.34 U3.2 | length 1358.9
  Top Layer w15: esp.34 342.83,266.97 344.8,265 v2(345,265) ; v2(1360,645) U3.2
  Bottom Layer w15: v2(345,265) 395,265 455,205 740,205 1180,645 v2(1360,645)
pads on no net: DHT22.3 esp.4 esp.5 esp.6 esp.7 esp.8 esp.10 esp.11 esp.12 esp.13 esp.14 esp.17 esp.18 esp.19 esp.20 esp.21 esp.22 esp.23 esp.24 esp.27 esp.32 LDR.4 MQ-135.3 tps.2 tps.3 tps.5 U1.4 U3.7 U3.8 U3.9 U3.10 U3.11 U3.12 U3.15 USB1.4

## Polygon pours and split planes (outlines as drawn)
GND on Top Layer "Kyuubi" (solid, remove dead copper, pour order 2): 1905,2730 1905,1575 2375,1575 2375,2550 2560,2550 2560,0 0,0 0,2725 -5,2730 10,2730 -5,2730 10,2730
GND on Bottom Layer "Kyuubi" (solid, remove dead copper, pour order 3): 1895,2720 1905,2730 1905,1575 2370,1575 2375,1570 2375,2545 2560,2545 2560,0 0,0 0,2720

## Keep-outs
Keep-Out Layer:
  lines w10: 0,0 0,3845 620,3845 1130,3845 1430,3845 1435,3850 1935,3850 2560,3850 2560,0 0,0

## Silkscreen, mask and mechanical layers (free items; w line width, h text height)
Top Overlay:
  drawing of 906 lines, arcs and shapes, not listed

## Text inside footprints (layer, text, board x,y; h text height)
esp: Mechanical 13 "ANTENNA" at 834.61,-80.28 h70 r180